# Altium PCB AIRZAI_LID_BD_REVC.PcbDoc (part 2 of 2)
Units mm, origin at the board's own origin, x right, y up, seen from the top; angles counter-clockwise.
Board outline 86.34 x 69.25 mm, 4 copper layers (Top, GND, PWR, Bottom), stack 0.78 mm thick; 60 components, 34 nets, 183 pads, 193 vias.
Unrouted connection lines stored in the file: 106.
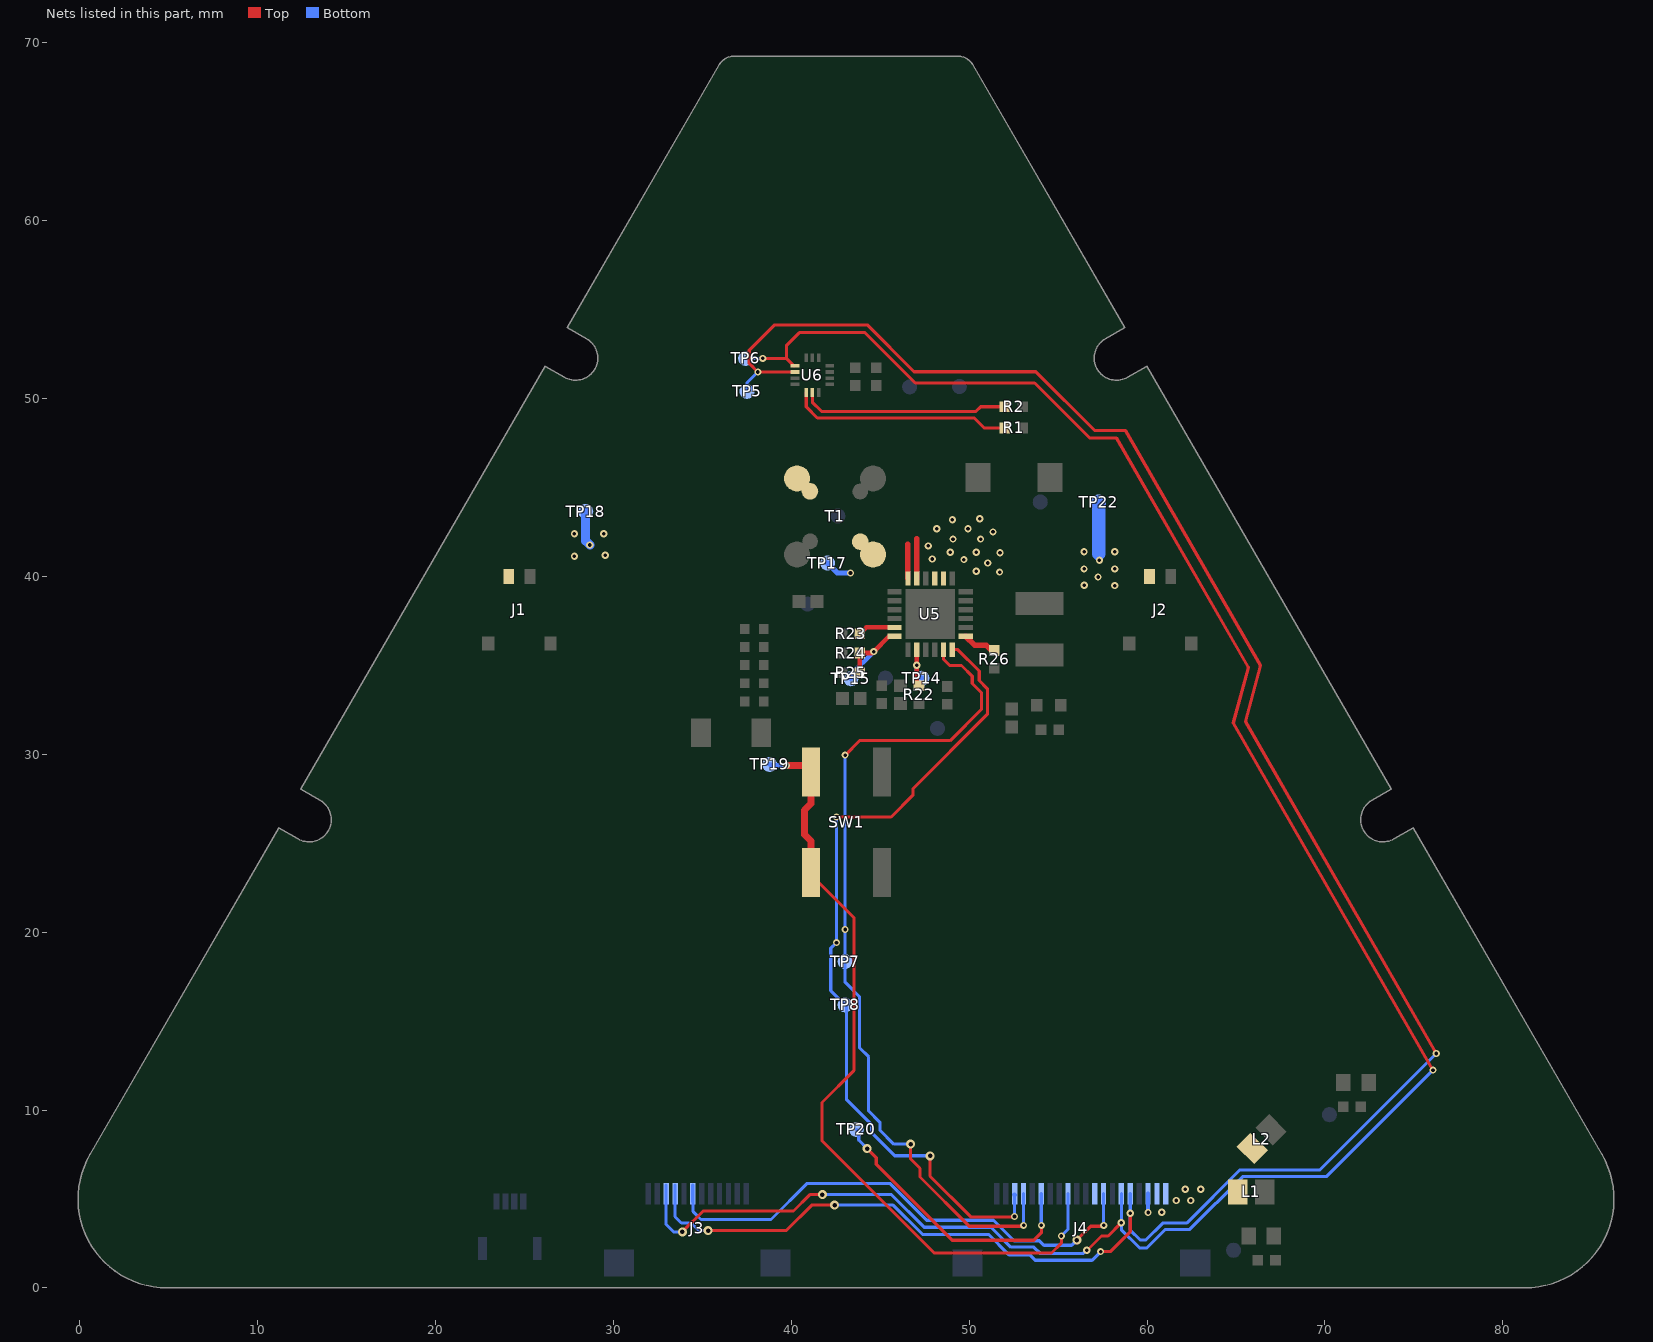
[diagram p4: the nets of this part, all layers, seen from the top]

## Via types
v1: diameter 0.406, hole 0.203, Top to Bottom, tented both sides, 127 vias
v2: diameter 0.508, hole 0.254, Top to Bottom, tented both sides, 61 vias
v3: diameter 0.508, hole 0.254, Top to Bottom, 5 vias

## Nets (pads, with @x,y where several pads share a name; then routed paths per layer and width w, separated by ;. In a path a pad name is that pad's centre, name@x,y a point inside that pad or via, vN(x,y) a via of type N, cw(c..) or ccw(c..) an arc to the next point about the centre after c; other vN are vias at no path point) (continued)
NetJ1_1: J1.1 TP18.1 U5.21 | length 2
  Bottom w0.508: TP18.1@28.444,43.645 28.444,41.994 v1(28.672,41.765)
  other v1: 47.926,40.978 27.809,41.13 29.536,41.181 47.697,41.714 49.094,42.095 50.643,42.095 27.809,42.391 29.46,42.4 51.338,42.502 48.18,42.68 49.932,42.68 49.057,43.188 50.593,43.238
NetJ2_1: J2.1 TP22.1 U5.20 | length 2.9
  Bottom w0.762: 57.273,41.283 TP22.1@57.273,44.178
  other v1: 58.187,39.479 56.473,39.505 57.249,39.962 51.71,40.241 50.395,40.292 56.46,40.419 58.187,40.419 51.05,40.749 57.324,40.902 49.704,40.943 51.736,41.333 48.941,41.359 50.395,41.359 56.46,41.384 58.187,41.384
NetJ4_1: J4.1 J4.2 L1.1
  other v1: 61.639,4.91 62.451,4.91 62.15,5.545 63.013,5.545
NetJ4_3: J4.3 L2.1 | length 1.1
  Bottom w0.178: J4.3@60.055,5.298 J4.3@60.059,5.294
  Bottom w0.229: J4.3@60.055,5.298 60.055,4.239 v1(60.059,4.235)
  other v1: 60.829,4.248
NetR1_2: R1.2 U6.5 | length 12.5
  Top w0.178: U6.5@40.838,50.342 40.838,49.53 41.466,48.903 50.288,48.903 50.847,48.344 R1.2@52.006,48.344
NetR2_2: R2.2 U6.6 | length 11.7
  Top w0.178: U6.6@41.188,50.342 41.188,49.781 41.703,49.267 50.372,49.267 50.643,49.538 R2.2@52.006,49.538
NetR22_2: R22.2 TP14.1 U5.8 | length 3.1
  Top w0.254: R22.2@47.006,34.013 R22.2@47.057,33.962 ; R22.2@47.057,33.866 R22.2@47.057,33.962 ; U5.8@47.057,35.879 v1(47.057,35.009) R22.2@47.057,33.962 ; R22.2@47.175,33.844 R22.2@47.057,33.962
  Bottom w0.254: v1(47.057,35.009) 47.057,34.556 TP14.1@47.341,34.272
NetR23_1: R23.1 U5.5 | length 2.1
  Top w0.254: R23.1@43.856,36.773 44.212,37.129 U5.5@45.807,37.129
NetR24_1: R24.1 R25.2 TP15.1 U5.6 | length 5.5
  Top w0.254: R25.2@43.856,34.58 R24.1@43.856,35.692 44.552,35.692 v1(44.631,35.771) 45.49,36.629 U5.6@45.807,36.629
  Bottom w0.254: TP15.1@43.354,34.247 43.354,34.493 v1(44.631,35.771)
NetR26_1: R26.1 U5.13 | length 1.8
  Top w0.305: U5.13@49.807,36.629 50.299,36.138 50.95,36.138 R26.1@51.253,35.835
NetT1_2: T1.2 T1.4 TP17.1 U5.23 U5.24 | length 5.7
  Top w0.305: U5.24@46.557,39.879 46.557,41.818 ; U5.23@47.057,39.879 47.057,42.106
  Bottom w0.305: TP17.1@42.033,40.749 42.592,40.19 v1(43.328,40.19)
NFC_INT: J4.9
PWM1: J4.17 TP7.1 U5.11 | length 48.2
  Top w0.178: v1(43.023,29.954) 43.836,30.767 48.93,30.767 50.694,32.531 50.694,33.459 50.173,33.98 50.173,34.386 49.568,34.992 48.9,34.992 48.557,35.335 U5.11@48.557,35.879 ; v2(46.706,8.085) 46.706,7.247 47.236,6.716 47.236,6.234 50.009,3.461 53.008,3.461 v1(53.06,3.513)
  Bottom w0.178: v1(43.023,29.954) v1(43.023,20.15) TP7.1@43.023,18.346 43.023,17.182 43.836,16.369 43.836,13.495 44.344,12.987 44.344,9.945 44.979,9.31 44.979,8.875 45.769,8.085 v2(46.706,8.085) ; v1@53.055,3.513 J4.17@53.055,5.298
PWM2: J4.18 TP8.1 U5.12 | length 46.6
  Top w0.178: v1(42.541,26.474) 45.614,26.474 46.833,27.694 46.833,28.049 51.024,32.24 51.024,33.688 50.567,34.145 50.567,34.679 49.366,35.879 U5.12@49.057,35.879 ; v2@47.799,7.551 47.799,6.281 50.09,3.99 52.525,3.99 v1(52.547,4.013)
  Bottom w0.178: v1(42.541,26.474) v1(42.541,19.413) 42.217,19.09 42.217,16.714 43.1,15.832 43.1,10.599 44.522,9.177 44.522,8.72 45.817,7.424 v2(47.807,7.424) ; v1@52.555,3.97 J4.18@52.555,5.221
  Bottom w0.254: J4.18@52.532,5.244 J4.18@52.555,5.221
SCL: J3.10 J4.6 TP6.1 U6.1 | length 120.6
  Top w0.178: v2(33.873,3.15) 35.049,4.326 40.128,4.326 41.047,5.244 v2(41.753,5.244) ; v1(38.401,52.255) 39.724,52.255 ; U6.1@40.138,51.841 39.724,52.255 ; v1(56.612,2.12) 56.612,2.103 56.625,2.103 57.442,2.92 57.81,2.92 v1(58.555,3.665) ; v1@76.061,12.243 64.848,31.756 65.694,34.888 58.289,47.774 58.285,47.777 56.771,47.777 53.681,50.868 46.976,50.868 44.141,53.703 40.458,53.703 39.724,52.969 39.724,52.255
  Bottom w0.178: J3.10@32.962,5.776 32.962,3.565 33.377,3.15 v2(33.873,3.15) ; TP6.1@37.435,52.255 v1(38.401,52.255) ; v2(41.753,5.244) 45.635,5.244 47.471,3.408 51.23,3.408 52.345,2.294 53.641,2.294 53.996,1.938 56.414,1.938 56.596,2.12 v1(56.612,2.12) ; J4.6@58.555,5.298 v1(58.555,3.665) 58.555,3.272 59.584,2.243 59.991,2.243 61.036,3.288 62.408,3.288 65.375,6.256 70.074,6.256 76.061,12.243 v1(76.075,12.243)
SDA: J3.9 J4.5 TP5.1 U6.2 | length 124.1
  Top w0.178: v2(35.327,3.226) 39.713,3.226 41.144,4.656 v2(42.439,4.656) ; U6.2@40.138,51.491 v1(38.121,51.491) 37.639,51.973 37.639,52.713 39.061,54.135 44.268,54.135 46.9,51.503 53.749,51.503 57.052,48.2 58.785,48.2 66.38,34.983 65.532,31.844 v1(76.259,13.177) ; v1(57.388,2.04) 57.929,2.04 59.055,3.166 v1(59.055,4.199)
  Bottom w0.178: J3.9@33.462,5.776 33.462,4.006 33.823,3.645 34.369,3.645 34.789,3.226 v2(35.327,3.226) ; TP5.1@37.512,50.401 37.512,50.881 v1(38.121,51.491) ; v2(42.439,4.656) 45.725,4.656 47.376,3.005 51.09,3.005 52.233,1.862 53.412,1.862 53.717,1.557 56.914,1.557 57.397,2.04 v1(57.388,2.04) ; J4.5@59.055,5.298 v1(59.055,4.199) 59.055,3.249 59.614,2.69 59.933,2.69 60.883,3.64 62.226,3.64 65.214,6.628 69.709,6.628 v1(76.259,13.177)
SPR_GPO1: J4.12 SW1.1 TP19.1 | length 44.4
  Top w0.178: SW1.1@41.164,23.177 43.519,20.822 43.519,12.213 41.728,10.422 41.728,8.263 48.027,1.963 54.631,1.963 55.187,2.519 v1(55.187,2.92)
  Top w0.381: v1(39.721,29.37) 40.797,29.37 41.107,29.06 SW1.1@41.107,29 41.107,27.221 40.743,26.857 40.743,25.479 41.107,25.115 SW1.1@41.107,23.35
  Bottom w0.178: v1(55.187,2.92) 55.555,3.288 J4.12@55.555,5.298
  Bottom w0.254: TP19.1@38.782,29.433 38.844,29.37 v1(39.721,29.37)
SPR_GPO2: J4.15 TP20.1 | length 15.9
  Top w0.178: v2(44.268,7.825) 44.773,7.321 44.773,6.945 49.043,2.675 53.641,2.675 54.06,3.094 v1(54.06,3.513)
  Bottom w0.178: TP20.1@43.662,8.908 43.79,8.78 43.79,8.308 43.811,8.288 43.811,8.283 v2(44.268,7.825) v2@44.297,7.855 ; v1@54.055,3.513 J4.15@54.055,5.298
TOFINT: J3.7 J4.8 | length 30
  Top w0.178: v2@56.14,2.603 56.055,2.519 56.054,2.521 v2(56.054,2.69) 56.825,3.461 v1@57.551,3.461
  Bottom w0.178: J3.7@34.462,5.776 34.462,4.828 J3.7@34.48,4.81 ; J3.7@34.468,5.297 34.48,5.285 J3.7@34.48,4.81 ; v2(56.054,2.69) 55.759,2.395 54.199,2.395 53.945,2.649 52.523,2.649 51.367,3.805 47.608,3.805 45.539,5.874 40.89,5.874 38.859,3.843 34.924,3.843 34.48,4.287 J3.7@34.48,4.81 ; v1@57.555,3.513 J4.8@57.555,5.298
  other v1: 57.56,3.513
pads on no net: J1.0 J2.0 J3.3 J3.4 J3.5 J3.MP1 J3.MP2 J4.MP1 J4.MP2 J5.MP1 J5.MP2 U5.19 U5.22

## Polygon pours and split planes (outlines as drawn)
GND on Top "gnd-top" (solid, remove dead copper, pour order 19): 4.905,0 cw(c4.905,5) 0.575,7.5 11.179,25.867 12.262,25.242 ccw(c12.887,26.325) 13.512,27.408 12.429,28.033 26.161,51.817 27.244,51.192 ccw(c27.869,52.275) 28.494,53.358 27.411,53.983 35.937,68.75 cw(c36.803,68.25) 36.803,69.25 49.349,69.25 cw(c49.349,68.25) 50.215,68.75 58.741,53.983 57.658,53.358 ccw(c58.283,52.275) 58.908,51.192 59.991,51.817 73.723,28.033 72.64,27.408 ccw(c73.265,26.325) 73.89,25.242 74.973,25.867 85.577,7.5 cw(c81.247,5) 81.247,0
3V3 on Top "Top-3V3" (solid, remove dead copper, pour order 16): 46.884,8.491 46.884,10.015 42.312,10.015 42.312,8.491
NetJ4_3 on Top "Top-3.3V Input" (solid, remove dead copper, pour order 10): 63.824,6 64.334,6.51 65.719,6.51 66.837,7.628 65.071,9.394 64.436,8.796 63.801,8.301 62.937,7.678 62.138,7.196 61.438,6.866 60.702,6.637 60.372,6.561 59.937,6.488 59.937,6.051
NetC32_2 on Top "Top-NetC32_2" (solid, pour order 14): 52.549,46.82 52.548,42.426 52.548,39.884 51.442,38.777 49.399,38.777 49.399,37.992 51.038,37.992 51.532,37.498 55.418,37.498 55.8,37.879 55.8,46.82
+5 on Top "Top-+5" (solid, pour order 8): 40.585,41.762 40.585,39.301 41.198,39.301 41.198,37.969 46.222,37.969 46.222,38.285 44.847,38.285 44.293,38.839 44.293,39.632 42.693,39.632 42.693,41.762
GND on Bottom "gnd-bot" (solid, remove dead copper, pour order 21): 4.905,0 cw(c4.905,5) 0.575,7.5 11.179,25.867 12.262,25.242 ccw(c12.887,26.325) 13.512,27.408 12.429,28.033 26.161,51.817 27.244,51.192 ccw(c27.869,52.275) 28.494,53.358 27.411,53.983 35.937,68.75 cw(c36.803,68.25) 36.803,69.25 49.349,69.25 cw(c49.349,68.25) 50.215,68.75 58.741,53.983 57.658,53.358 ccw(c58.283,52.275) 58.908,51.192 59.991,51.817 73.723,28.033 72.64,27.408 ccw(c73.265,26.325) 73.89,25.242 74.973,25.867 85.577,7.5 cw(c81.247,5) 81.247,0
+5 on Bottom "+5v" (solid, remove dead copper, pour order 0): 32.101,6.434 32.101,5.088 31.513,5.088 31.253,4.828 27.936,4.828 27.936,6.256 28.977,6.256 29.942,6.307 30.728,6.408 31.644,6.434
GND on GND (split plane): 400 vertices, not listed, extent 0.415,0.51 85.737,68.74
+5 on PWR (split plane): 400 vertices, not listed, extent 0.415,0.51 85.737,68.74
3V3 on PWR (split plane): 252 vertices, not listed, extent 30.199,2.525 71.367,51.618

## Keep-outs
Keep-Out Layer:
  circle w0.127: c56.576,18 r11.4
  circle w0.127: c29.576,18 r11.4
  circle w0.127: c5.576,9.2 r1.15
  circle w0.127: c80.576,9.2 r1.15
  circle w0.127: c43.076,66.1 r1.15
  lines w0.127: 0.575,7.5 ccw(c4.905,5) 4.905,0 81.247,0 ccw(c81.247,5) 85.577,7.5 74.973,25.867 73.89,25.242 cw(c73.265,26.325) 72.64,27.408 73.723,28.033 59.991,51.817 58.908,51.192 cw(c58.283,52.275) 57.658,53.358 58.741,53.983 50.215,68.75 ccw(c49.349,68.25) 49.349,69.25 36.803,69.25 ccw(c36.803,68.25) 35.937,68.75 27.411,53.983 28.494,53.358 cw(c27.869,52.275) 27.244,51.192 26.161,51.817 12.429,28.033 13.512,27.408 cw(c12.887,26.325) 12.262,25.242 11.179,25.867 0.575,7.5

## Other copper
Top:
  rectangle net 3V3: 66.81,8.364 71.319,11.031
  rectangle net 3V3: 68.332,9.863 71.325,12.783
  rectangle net NetJ4_3: 59.762,3.99 61.134,6.459
  rectangle net NetJ4_1: 61.413,4.681 65.654,5.774
  rectangle net +5: 38.223,30.869 41.576,37.955
  rectangle net +5: 64.131,1.201 66.264,4.351
  rectangle net +5: 64.664,3.716 66.849,4.249
  rectangle net +5: 66.01,3.64 66.849,6.104
  rectangle net NetD3_1: 43.074,44.813 44.776,46.921
  rectangle net +5: 38.909,40.089 41.441,42.832
  rectangle net NetT1_2: 38.909,43.772 42.049,46.896
  region net NetT1_2: 43.201,41.841 44.06,42.701 41.719,45.042 40.86,44.182
  rectangle net +5: 41.042,37.193 42.287,37.879
  region net NetJ1_1: 29.942,40.791 29.942,42.705 25.802,42.705 25.802,40.791
  region net NetJ1_1: 29.409,40.791 29.409,42.222 23.262,42.222 23.262,40.791
  region net NetJ1_1: 24.523,39.327 24.523,42.222 23.288,42.222 23.288,39.327
  region net NetJ2_1: 60.448,39.174 60.448,41.689 56.109,41.689 56.109,39.174
  region net NetC31_2: 45.36,32.418 45.36,33.104 43.531,33.104 43.531,32.418
  region net NetJ1_1: 51.71,41.791 51.71,43.569 47.371,43.569 47.371,41.791
  region net +5: 44.058,37.447 44.058,39.352 41.042,39.352 41.042,37.447
  region net NetJ2_1: 52.015,39.936 52.015,41.613 49.653,41.613 49.653,39.936
  region net NetJ2_1: 51.869,40.571 51.869,41.613 48.408,41.613 48.408,40.571
  region net NetJ2_1: 48.713,39.784 48.713,40.749 48.408,40.749 48.408,39.784
  region net NetJ1_1: 48.256,40.571 48.256,42.502 47.367,42.502 47.367,40.571
  region net NetJ1_1: 48.205,39.784 48.205,40.876 47.926,40.876 47.926,39.784
  rectangle net NetD3_1: 43.303,43.873 52.182,46.896
  rectangle net NetT1_2: 43.049,39.962 46.019,42.908
  rectangle net NetT1_2: 43.049,40.571 47.208,42.908
  pour cut-out: 31.635,61.298 35.937,68.75 cw(c36.803,68.25) 36.803,69.25 49.349,69.25 cw(c49.349,68.25) 50.215,68.75 54.517,61.298
  pour cut-out: 45.657,40.029 45.657,35.745 49.967,35.745 49.957,35.755 49.957,40.029
  pour cut-out: 39.788,49.916 42.588,49.916 42.588,52.716 39.788,52.716
Bottom:
  rectangle net +5: 24.812,4.478 27.047,5.26
  rectangle net +5: 27.793,4.757 32.051,5.592
  rectangle net NetJ4_3: 59.847,3.99 61.144,4.494
  rectangle net GND: 21.078,4.453 23.44,5.313
  rectangle net 3V3: 30.857,2.624 32.584,4.3
  rectangle net GND: 36.902,4.757 38.553,7.628
  rectangle net NetJ4_1: 62.353,5.294 63.369,5.85
  rectangle net NetJ4_1: 60.473,4.707 62.705,5.85
  rectangle net NetJ2_1: 54.25,38.92 58.467,42.629
  rectangle net NetJ2_1: 52.548,39.962 58.467,42.68
  rectangle net NetJ1_1: 30.908,40.749 34.895,47.607
  rectangle net NetJ1_1: 29.841,40.749 33.092,42.73
  rectangle net NetJ1_1: 31.797,44.61 45.411,47.607
  rectangle net NetJ2_1: 52.544,41.105 54.047,42.07
  rectangle net NetJ1_1: 26.894,40.775 29.942,42.73
  region net NetJ1_1: 51.71,42.883 51.71,47.607 45.182,47.607 45.182,42.883
  region net NetJ1_1: 48.205,39.987 48.205,43.137 45.182,43.137 45.182,39.987
  region net NetJ1_1: 51.71,41.841 51.71,43.162 46.681,43.162 46.681,41.841
  region net NetJ2_1: 56.714,39.987 56.714,41.664 48.434,41.664 48.434,39.987
  pour cut-out: 31.635,61.298 35.937,68.75 cw(c36.803,68.25) 36.803,69.25 49.349,69.25 cw(c49.349,68.25) 50.215,68.75 54.517,61.298
  region net 3V3: 52.269,30.657
GND (plane layer: these items are gaps in the copper):
  region: 32.885,61.247
PWR (plane layer: these items are gaps in the copper):
  lines w0.254: 27.606,6.815 31.484,6.815 31.484,4.822 30.069,3.407 30.069,2.395 35.03,2.395 40.008,7.374 43.303,7.374 46.529,4.148 63.877,4.148 63.877,5.24 68.373,5.24 71.497,8.364 71.497,13.266 66.961,13.266 ; 39.17,23.57 44.395,28.795 44.395,44.322 39.312,49.405 39.312,51.747 46.337,51.747 48.764,49.32 48.764,25.636 50.159,27.032

## Silkscreen, mask and mechanical layers (free items; w line width, h text height)
Top Overlay:
  lines w0.191: 42.296,48.634 42.588,48.342 ; 42.881,48.634 42.588,48.342 ; 43.669,49.423 43.962,49.715 ; 43.669,50.008 43.962,49.715 ; 42.588,48.342 42.588,49.715 43.962,49.715
  text "Y" at 44.104,48.801 h1.27
  text "X" at 42.221,47.353 h1.27
Bottom Overlay:
  rectangle: 23.058,30.513 34.108,35.618
  text "Airzai LID BRD Rev C" at 40.902,36.076 h2.29
Mechanical 1:
  lines w0.013: 37.246,57.869 37.203,57.844 37.503,57.325 37.546,57.35 ; 37.758,56.982 37.715,56.957 38.015,56.437 38.058,56.462 ; 38.283,56.072 38.24,56.047 38.54,55.528 38.583,55.553 ; 40.277,59.619 40.32,59.644 40.62,59.125 40.577,59.1 ; 40.789,58.732 40.833,58.757 41.133,58.237 41.089,58.212 ; 41.315,57.822 41.358,57.847 41.658,57.328 41.615,57.303 ; 41.598,56.831 38.783,55.206 37.033,58.238 40.064,59.988 41.689,57.173 ; 44.564,57.303 44.521,57.328 44.821,57.847 44.864,57.822 ; 45.089,58.212 45.046,58.237 45.346,58.757 45.389,58.732 ; 45.602,59.1 45.559,59.125 45.859,59.644 45.902,59.619 ; 47.179,55.331 44.364,56.956 46.114,59.988 49.145,58.238 47.52,55.423 ; 47.595,55.553 47.639,55.528 47.939,56.047 47.895,56.072 ; 48.12,56.462 48.164,56.437 48.464,56.957 48.42,56.982 ; 48.633,57.35 48.676,57.325 48.976,57.844 48.933,57.869 ; 41.594,56.818 41.828,56.953 41.693,57.187 41.594,56.818 ; 47.165,55.328 47.534,55.427 47.399,55.193 47.165,55.328
Mechanical 2:
  lines w0.05: -5.284,-0.146 2.636,-0.146 ; -0.364,2.855 -0.362,-2.261 ; 17.12,22.604 cw(c28.876,18) 24.033,6.341 ; 28.432,30.617 ccw(c28.876,18) 28.876,5.375 ; 56.576,5.375 ccw(c56.576,18) 57.02,30.617 ; 61.42,29.659 ccw(c56.576,18) 68.332,13.397
  lines w0.254: 28.432,30.617 36.929,45.336 cw(c42.726,41.989) 48.522,45.336 57.02,30.617 ; 28.812,5.377 56.512,5.377
Mechanical 3:
  lines w0.001: 22.341,38 24.726,38 24.726,40.1 ; 39.626,26 42.726,26 42.726,22.6 ; 60.726,35.9 60.726,38 63.111,38 ; 22.341,35.9 22.341,40.1 27.111,40.1 27.111,35.9 22.341,35.9 ; 39.626,22.6 45.826,22.6 45.826,29.4 39.626,29.4 39.626,22.6 ; 58.341,35.9 63.111,35.9 63.111,40.1 58.341,40.1 58.341,35.9
  lines w0.127: 4.905,-3.768 4.905,0 ; 22.405,-3.768 22.405,0 ; 24.565,-3.768 24.565,0 ; 31.635,61.298 35.937,68.75 cw(c36.803,68.25) 36.803,69.25 49.349,69.25 cw(c49.349,68.25) 50.215,68.75 54.517,61.298 51.833,61.298 31.635,61.298
Mechanical 4:
  circle w0.127: c43.076,66.1 r1.15
  circle w0.127: c29.576,18 r11.4
  circle w0.127: c56.576,18 r11.4
  circle w0.127: c80.576,9.2 r1.15
  circle w0.127: c5.576,9.2 r1.15
  lines w0.127: 0.575,7.5 ccw(c4.905,5) 4.905,0 81.247,0 ccw(c81.247,5) 85.577,7.5 74.973,25.867 73.89,25.242 cw(c73.265,26.325) 72.64,27.408 73.723,28.033 59.991,51.817 58.908,51.192 cw(c58.283,52.275) 57.658,53.358 58.741,53.983 50.215,68.75 ccw(c49.349,68.25) 49.349,69.25 36.803,69.25 ccw(c36.803,68.25) 35.937,68.75 27.411,53.983 28.494,53.358 cw(c27.869,52.275) 27.244,51.192 26.161,51.817 12.429,28.033 13.512,27.408 cw(c12.887,26.325) 12.262,25.242 11.179,25.867 0.575,7.5
Mechanical 5:
  drawing of 2403 lines, arcs and shapes, not listed
  text "69,25" at -24.261,34.625 h3.5 r90
  text "R3" at 77.116,14.374 h3.5 r318
  text "86,18" at 43.089,-8.372 h3.5
Drill Drawing:
  circle w0.254: c-110.07,-66.294 r0.847
  lines w0.254: -110.916,-62.907 -110.493,-62.907 -110.07,-63.33 -109.646,-62.907 -109.223,-62.907 -109.646,-62.484 -109.223,-62.06 -109.646,-62.06 -110.07,-61.637 -110.493,-62.06 -110.916,-62.06 -110.493,-62.484 -110.916,-62.907 ; -6.782,2.827 -0.782,2.827 -0.782,6.827 -6.782,6.827 -6.782,2.827 ; 2.643,-4.573 2.643,-0.573 8.643,-0.573 8.643,-4.573 2.643,-4.573 ; 151.693,37.577 157.693,37.577 157.693,41.577 151.693,41.577 151.693,37.577 ; 151.693,64.827 151.693,68.827 157.693,68.827 157.693,64.827 151.693,64.827 ; 151.943,44.827 151.943,48.827 157.943,48.827 157.943,44.827 151.943,44.827
  lines w0.381: -112.435,-60.663 149.215,-60.663 ; -98.443,-64.473 -98.443,-72.093 -98.443,-56.853 ; -87.422,-72.093 -87.422,-64.473 ; -83.461,-72.093 -83.461,-56.853 ; -69.088,-72.093 -69.088,-64.473 ; -56.238,-72.093 -56.238,-64.473 ; -55.783,-72.093 -55.783,-56.853 ; -42.933,-72.093 -42.933,-56.853 ; -37.6,-72.093 -37.6,-64.473 ; -24.295,-72.093 -24.295,-56.853 ; -7.383,-72.093 -7.383,-64.473 ; 5.922,-72.093 5.922,-56.853 ; 7.599,-72.093 7.599,-64.473 ; 20.905,-72.093 20.905,-56.853 ; 26.543,-72.093 26.543,-64.473 ; 39.848,-72.093 39.848,-56.853 ; 43.048,-72.093 43.048,-64.473 ; 58.639,-72.093 58.639,-56.853 ; 64.734,-72.093 64.734,-64.473 ; 80.324,-72.093 80.324,-56.853 ; 98.608,-72.093 98.608,-64.473 ; 114.198,-72.093 114.198,-56.853 ; 149.215,-68.283 -112.435,-68.283 ; -112.435,-72.093 133.624,-72.093 133.624,-64.473 -112.435,-64.473 -112.435,-72.093 ; -112.435,-72.093 149.215,-72.093 149.215,-56.853 -112.435,-56.853 -112.435,-72.093 ; -112.435,-68.283 133.624,-68.283 -112.435,-68.283
  text "5" at -4.532,3.827 h2
  text "5" at 4.893,-3.573 h2
  text "+/-0.080MM" at 183.887,-57.298 h2
  text "+/-0.080MM" at 150.437,-57.498 h2
  text "Symbol" at -110.149,-59.52 h1.83
  text "Count" at -97.3,-59.52 h1.83
  text "Hole Size" at -82.318,-59.52 h1.83
  text "Plated" at -54.64,-59.52 h1.83
  text "Hole Type" at -41.79,-59.52 h1.83
  text "Drill Layer Pair" at -23.152,-59.52 h1.83
  text "Via/Pad" at 7.065,-59.52 h1.83
  text "Pad Shape" at 22.048,-59.52 h1.83
  text "Template" at 40.991,-59.52 h1.83
  text "Description" at 59.782,-59.52 h1.83
  text "Hole Tolerance (+)" at 81.467,-59.52 h1.83
  text "Hole Tolerance (-)" at 115.341,-59.52 h1.83
  text "66" at -97.3,-63.33 h1.52
  text "0.254mm (10.00mil)" at -82.318,-63.33 h1.52
  text "PTH" at -54.64,-63.33 h1.52
  text "Round" at -41.79,-63.33 h1.52
  text "Top - Bottom" at -23.152,-63.33 h1.52
  text "Via" at 7.065,-63.33 h1.52
  text "Rounded" at 22.048,-63.33 h1.52
  text "(Mixed)" at 40.991,-63.33 h1.52
  text "Symbol" at -110.149,-67.14 h1.83
  text "Count" at -97.3,-67.14 h1.83
  text "127" at -97.3,-67.14 h1.52
  text "Hole Size" at -86.279,-67.14 h1.83
  text "0.203mm (8.00mil)" at -82.318,-67.14 h1.52
  text "Plated" at -67.945,-67.14 h1.83
  text "Hole Type" at -55.095,-67.14 h1.83
  text "PTH" at -54.64,-67.14 h1.52
  text "Round" at -41.79,-67.14 h1.52
  text "Drill Layer Pair" at -36.457,-67.14 h1.83
  text "Top - Bottom" at -23.152,-67.14 h1.52
  text "Via/Pad" at -6.24,-67.14 h1.83
  text "Via" at 7.065,-67.14 h1.52
  text "Pad Shape" at 8.742,-67.14 h1.83
  text "Rounded" at 22.048,-67.14 h1.52
  text "Template" at 27.686,-67.14 h1.83
  text "v41h20m0mx0" at 40.991,-67.14 h1.52
  text "Description" at 44.191,-67.14 h1.83
  text "Hole Tolerance (+)" at 65.877,-67.14 h1.83
  text "Hole Tolerance (-)" at 99.751,-67.14 h1.83
  text "193 Total" at -97.3,-70.95 h1.52
  text "PWB, LID BOARD" at 226.493,-107.523 h4
  text "PWB-103017-001" at 229.918,-115.273 h3.25
  text "1" at 291.493,-116.598 h2
  text "1" at 286.693,-116.698 h2
  text "VIAS UNDER U3(BGA) TO BE FILLED." at 249.793,-172.573 h3
Mechanical 17:
  drawing of 463 lines, arcs and shapes, not listed
  text "FABRICATION NOTES" at 108.251,98.534 h3.81
  text "UNLESS OTHERWISE SPECIFIED IN THE ECOBEE PURCHASE ORDER, THE FOLLOWING SPECIFICATIONS  / SHALL APPLY.  / ANY DEVIATION SHALL REQUIRE WRITTEN APPROVAL FROM AN ECOBEE REPRESENTATIVE. /  / 1. BOARD DATA VIEWED FROM PRIMARY SIDE. / 2. LATEST REVISIONS SHALL APPLY TO ALL SPECIFICATIONS. / 3. FABRICATE PCB IN ACCORDANCE WITH IPC-6013C TYPE 2 USING SUPPLIED GERBER OR  / ODB++ CAD DATA. /  /           Performance Class   - Class 2 /           Installation Usage  - Use B /  / 4. FINISH:  IMMERSION GOLD /  / ALL EXPOSED CONDUCTIVE PATTERN AREAS NOT COVERED WITH COVERLAY MATERIAL OR OTHER PLATING  / SHALL BE IMMERSION GOLD (0.000030-0.000090 mm) OVER ELECTROLESS NICKEL (0.001-0.006 mm). /  / 5. LEGEND SHALL BE WHITE, PERMANENT, ORGANIC, NON-CONDUCTIVE UV OR EPOXY TYPE INK APPLIED  / TO THE TOP SIDE OF THE BOARD. THERE SHALL BE NO LEGEND ON ANY SOLDERABLE COMPONENT LAND. /  / 6. ALL ASSEMBLY MATERIALS TO BE RoHS COMPLIANT. /  / 7. THIS IS A NON-WASHABLE ASSEMBLY! /  / 8. ANY LABELS OR COMPOSITION OF, APPLIED TO THE BOARD NEED TO BE APPROVIED BY AIRZAI /  / 14. MINIMUM TRACE WIDTHS: /           EXTERNAL: 0.178 mm  INTERNAL: N/A /  / 15. MINIMUM SPACE BETWEEN FEATURES: /          EXTERNAL: 0.148 mm  INTERNAL: N/A /  / 16. Overall Board Thickness: 31 mils" at 107.946,-20.947 h2.2
  text "Layer" at 13.752,-30.719 h1.52
  text "Name" at 24.164,-30.719 h1.52
  text "Material" at 47.779,-30.719 h1.52
  text "Thickness" at 69.617,-30.719 h1.52
  text "Constant" at 86.123,-30.719 h1.52
  text "Board Layer Stack" at 100.597,-30.719 h1.52
  text "1" at 13.752,-33.767 h1.52
  text "Top Overlay" at 24.164,-33.767 h1.52
  text "2" at 13.752,-36.815 h1.52
  text "Top Solder" at 24.164,-36.815 h1.52
  text "Solder Resist" at 47.779,-36.815 h1.52
  text "0.40mil" at 69.617,-36.815 h1.52
  text "3.5" at 86.123,-36.815 h1.52
  text "3" at 13.752,-39.863 h1.52
  text "Top" at 24.164,-39.863 h1.52
  text "Copper" at 47.779,-39.863 h1.52
  text "2.36mil" at 69.617,-39.863 h1.52
  text "4" at 13.752,-42.911 h1.52
  text "Dielectric1" at 24.164,-42.911 h1.52
  text "FR-4" at 47.779,-42.911 h1.52
  text "5.20mil" at 69.617,-42.911 h1.52
  text "4.8" at 86.123,-42.911 h1.52
  text "5" at 13.752,-45.959 h1.52
  text "GND" at 24.164,-45.959 h1.52
  text "Copper" at 47.779,-45.959 h1.52
  text "2.36mil" at 69.617,-45.959 h1.52
  text "6" at 13.752,-49.007 h1.52
  text "Dielectric 2" at 24.164,-49.007 h1.52
  text "10.87mil" at 69.617,-49.007 h1.52
  text "4.2" at 86.123,-49.007 h1.52
  text "7" at 13.752,-52.055 h1.52
  text "PWR" at 24.164,-52.055 h1.52
  text "Copper" at 47.779,-52.055 h1.52
  text "2.36mil" at 69.617,-52.055 h1.52
  text "8" at 13.752,-55.103 h1.52
  text "Dielectric3" at 24.164,-55.103 h1.52
  text "FR-4" at 47.779,-55.103 h1.52
  text "5.20mil" at 69.617,-55.103 h1.52
  text "4.8" at 86.123,-55.103 h1.52
  text "9" at 13.752,-58.151 h1.52
  text "Bottom" at 24.164,-58.151 h1.52
  text "Copper" at 47.779,-58.151 h1.52
  text "2.36mil" at 69.617,-58.151 h1.52
  text "10" at 13.752,-61.199 h1.52
  text "Bottom Solder" at 24.164,-61.199 h1.52
  text "Solder Resist" at 47.779,-61.199 h1.52
  text "0.40mil" at 69.617,-61.199 h1.52
  text "3.5" at 86.123,-61.199 h1.52
  text "11" at 13.752,-64.247 h1.52
  text "Bottom Overlay" at 24.164,-64.247 h1.52
  text "PWA, LID BOARD" at 225.018,-107.598 h4
  text "PWA-103017-001" at 229.093,-114.998 h3.25
  text "2" at 286.493,-116.398 h1.5
  text "2" at 291.293,-116.398 h1.5
Mechanical 18:
  lines w0.127: -71.842,-62.193 -66.762,-62.193 ; -71.842,-1.868 -66.762,-1.868 ; -71.842,58.457 -66.762,58.457 ; -8.342,-122.518 -8.342,-117.438 ; -8.342,113.702 -8.342,118.782 ; 55.158,-122.518 55.158,-117.438 ; 55.158,113.702 55.158,118.782 ; 118.658,-122.518 118.658,-117.438 ; 118.658,113.702 118.658,118.782 ; 182.158,-122.518 182.158,-117.438 ; 182.158,113.702 182.158,118.782 ; 189.758,-109.874 304.058,-109.874 ; 189.758,-103.734 216.953,-103.734 ; 189.758,-97.789 216.953,-97.789 ; 189.758,-92.434 216.953,-92.434 ; 189.778,-117.438 304.078,-117.438 ; 205.653,-117.519 205.653,-87.039 ; 216.953,-117.494 216.953,-87.014 ; 216.953,-100.554 304.054,-100.554 ; 225.588,-87.014 304.058,-87.014 ; 227.858,-87.014 189.758,-87.014 ; 245.658,-122.518 245.658,-117.438 ; 245.658,113.702 245.658,118.782 ; 294.498,-117.494 294.498,-109.874 ; 304.078,-86.958 304.078,-117.438 ; 304.078,-62.193 309.158,-62.193 ; 304.078,-1.868 309.158,-1.868 ; 304.078,58.457 309.158,58.457 ; 154.198,-117.494 154.198,-87.014 189.758,-87.014 ; 154.198,-117.494 189.758,-117.494 ; 154.198,-117.494 189.758,-117.494 ; 189.758,-117.494 189.758,-87.014 ; 189.758,-117.494 304.058,-117.494 ; 189.758,-117.494 304.058,-117.494 ; 304.058,-117.494 304.058,-87.014 ; 304.058,-117.494 304.058,-87.014 ; 304.078,-117.438 -66.762,-117.438 -66.762,113.702 304.078,113.702 304.078,-117.438 ; -71.842,-122.518 309.158,-122.518 309.158,118.782 -71.842,118.782 -71.842,-122.518
  text "1" at -40.566,115.48 h1.78
  text "2" at 22.824,115.48 h1.78
  text "3" at 86.053,115.48 h1.78
  text "4" at 149.723,115.48 h1.78
  text "5" at 213.197,115.48 h1.78
  text "6" at 276.824,115.48 h1.78
  text "A" at -69.937,86.448 h1.78
  text "A" at 305.983,86.448 h1.78
  text "B" at -69.937,25.996 h1.78
  text "B" at 305.983,25.996 h1.78
  text "C" at -69.937,-34.329 h1.78
  text "C" at 305.983,-34.329 h1.78
  text "AIRZAI PROPRIETARY & CONFIDENTIAL" at 193.718,-84.198 h3.25
  text "DATE:" at 206.428,-88.594 h1.14
  text "ENGINEER:" at 190.328,-88.754 h1.14
  text "UNLESS OTHERWISE SPECIFIED" at 156.728,-90.294 h1.5
  text "25/07/19" at 206.614,-91.353 h1.5
  text "FD" at 195.227,-91.512 h2
  text "DIMENSIONS ARE IN MM" at 159.828,-93.494 h1.5
  text "PCB DESIGNER:" at 190.228,-94.047 h1.14
  text "DATE:" at 206.128,-94.094 h1.14
  text "D" at -69.937,-94.527 h1.78
  text "D" at 305.983,-94.527 h1.78
  text "AIRZAI" at 224.343,-95.498 h3.25
  text "25/07/19" at 206.539,-96.528 h1.5
  text "TOLERANCES" at 164.928,-96.694 h1.5
  text "DFM" at 194.557,-96.843 h2
  text "DATE:" at 206.128,-99.494 h1.14
  text "CHECK" at 190.228,-99.547 h1.14
  text "ANGULAR" at 177.228,-100.694 h1.5
  text "DECIMALS" at 156.828,-100.994 h1.5
  text "TITLE:" at 218.268,-102.173 h1.14
  text "25/07/19" at 206.464,-102.328 h1.5
  text "FD" at 196.227,-102.512 h2
  text ".XX +/- .127MM" at 155.628,-104.994 h1.5
  text "+/-" at 176.928,-105.094 h1.5
  text "REL" at 190.528,-105.414 h1.14
  text "DATE:" at 206.528,-105.594 h1.14
  text "FD" at 195.977,-108.012 h2
  text "25/07/19" at 206.239,-108.153 h1.5
  text ".XXX +/- .080MM" at 155.328,-109.094 h1.5
  text "REV:" at 295.068,-111.494 h1.14
  text "SCALE:" at 206.668,-111.514 h1.14
  text "DWG NO:" at 218.128,-111.714 h1.14
  text "SIZE" at 190.528,-111.794 h1.14
  text "B" at 195.703,-115.111 h3.05
  text "DO NOT SCALE DRAWING" at 156.728,-115.194 h1.8
  text "C" at 297.193,-115.598 h3.05
  text "1:1" at 207.903,-115.711 h3.05
  text "SHEET" at 280.728,-116.514 h1.14
  text "OF" at 287.428,-116.514 h1.14
  text "1" at -40.566,-120.74 h1.78
  text "2" at 22.824,-120.74 h1.78
  text "3" at 86.053,-120.74 h1.78
  text "4" at 149.723,-120.74 h1.78
  text "5" at 213.197,-120.74 h1.78
  text "6" at 276.824,-120.74 h1.78